# Altium PCB SUBBOARD-MCU.PcbDoc
Units mil, origin at the board's own origin, x right, y up, seen from the top; angles counter-clockwise.
Board outline 4965 x 4640 mil, 2 copper layers (Top Layer, Bottom Layer); 3 components, 0 nets, 288 pads, 0 vias.
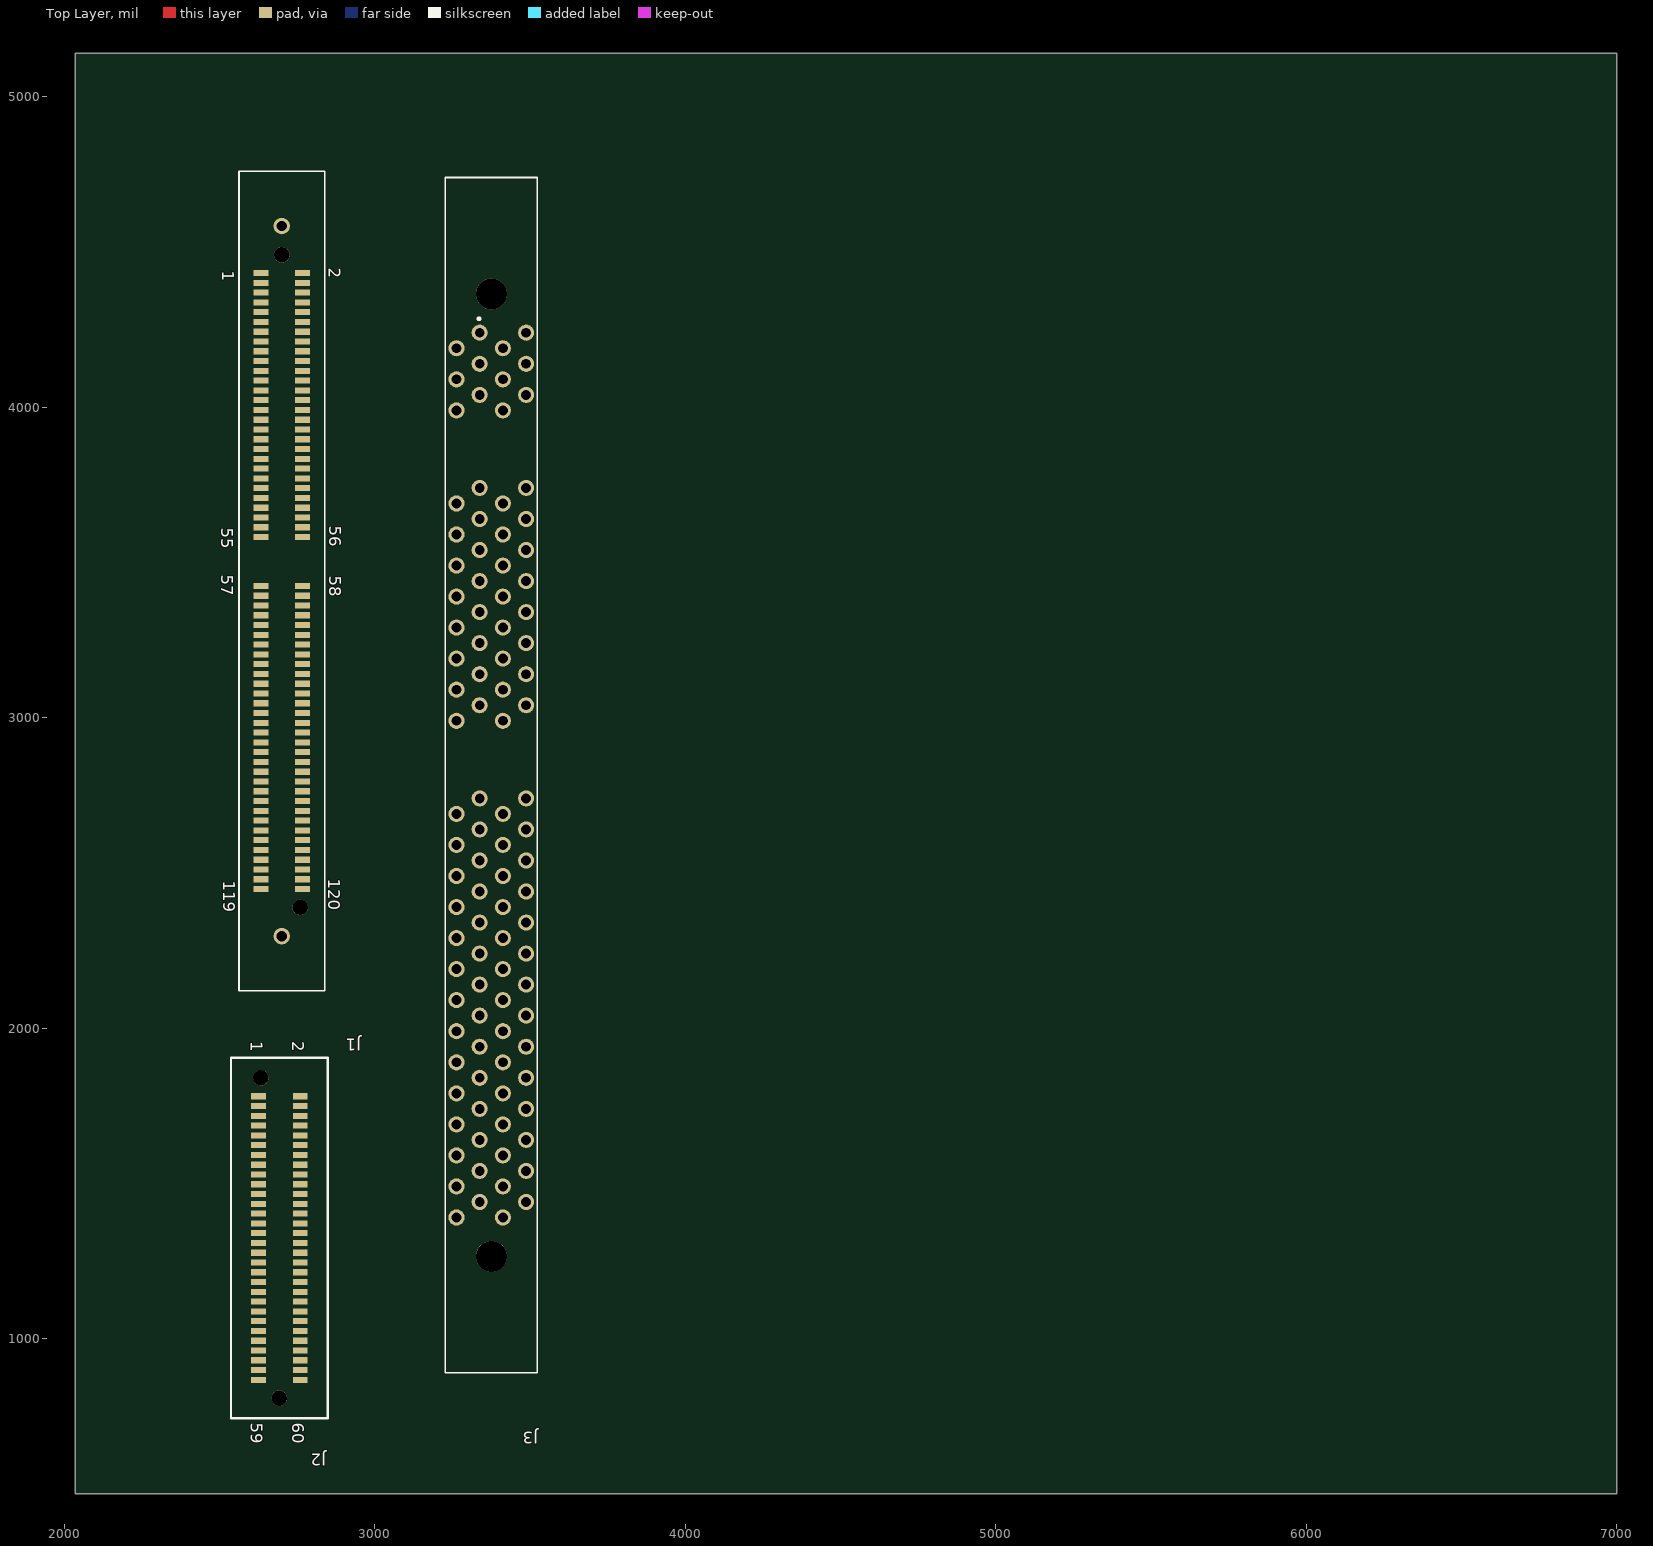
[diagram p0: Top Layer view]
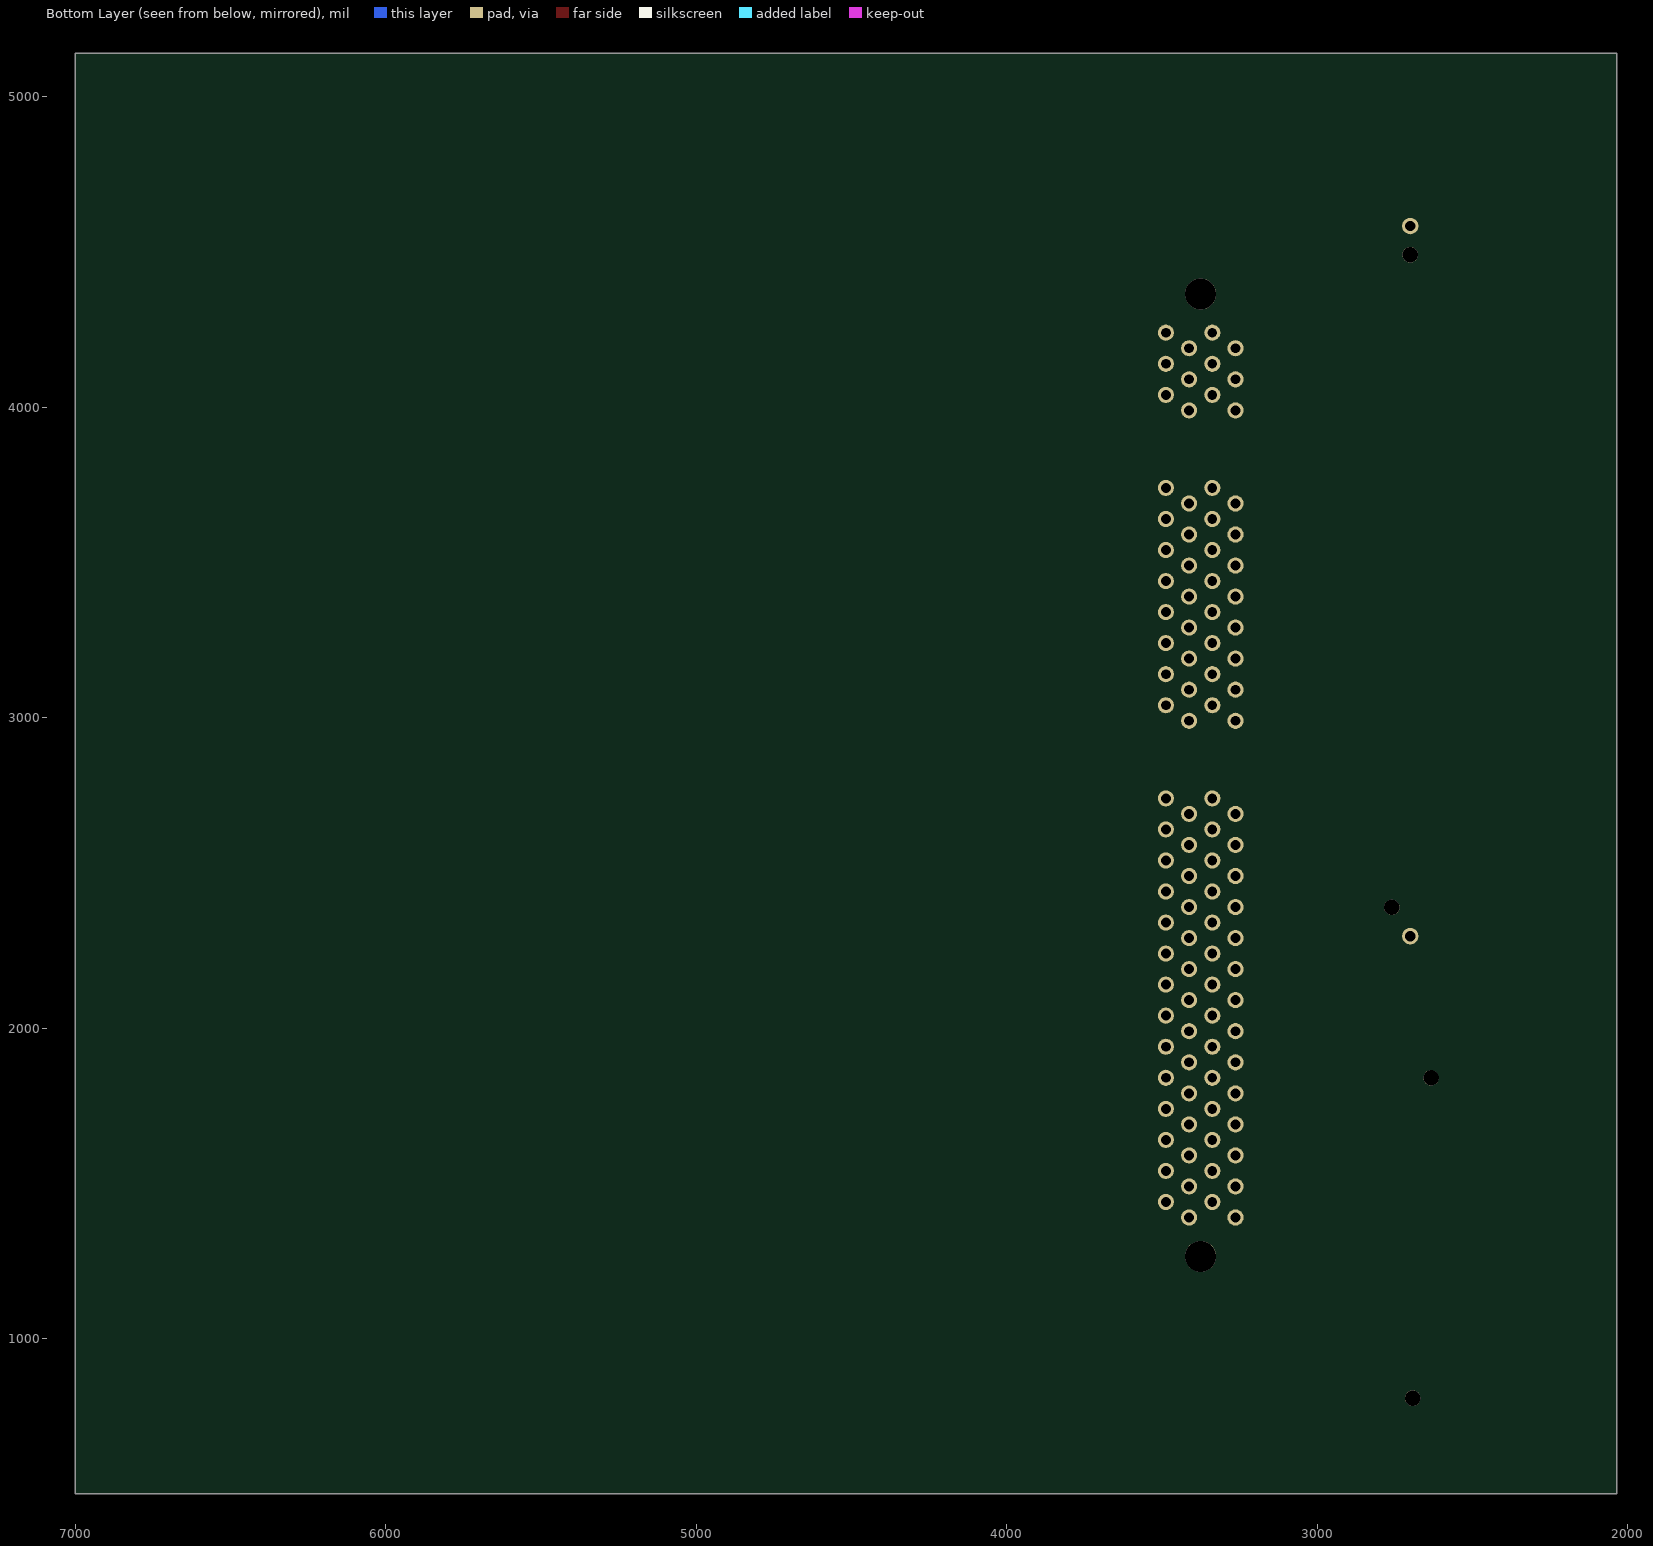
[diagram p1: Bottom Layer view, seen from below]

## Layer stack, top to bottom
Top Solder: solder mask 0.4, Solder Resist, Dk 3.5
Top Layer: signal copper 1.4
Dielectric 1: dielectric 12.6, FR-4, Dk 4.8
Bottom Layer: signal copper 1.4
Bottom Solder: solder mask 0.4, Solder Resist, Dk 3.5

## Board outline
2035,500 7000,500 7000,5140 2035,5140

## Design rules (kind name [scope] priority, off if disabled: settings)
Clearance [All] p1: gap=10 ignorepadtopadclearanceinfootprint=FALSE except(0: Arc-Hole Track-Hole SMDPad-Hole THPad-Hole Via-Hole Fill-Hole Poly-Hole Region-Hole Text-Hole)
PolygonConnect [All] p1: connectstyle=Relief reliefconductorwidth=10 reliefentries=4 polygonreliefangle="90 Angle" airgapwidth=10
RoomDefinition SUBBOARD-MCU [InComponentClass('SUBBOARD-MCU')] p1: confinementstyle=ConfineIn formatcopy=TRUE lockcomponents=FALSE outline 2195,540 4315,540 4315,4995 2195,4995
RoutingVias [All] p1: holewidth=28 width=50 viastyle="Through Hole" minholewidth=28 minwidth=50 maxholewidth=28 maxwidth=50
SolderMaskExpansion [All] p1: expansion=4 istentingtop=FALSE
Width [All] p1: maxlimit=10 minlimit=10 preferedwidth=10
30 further rules are at their usual default settings.

## Components (designator, comment, footprint, x,y, rotation, side; value= is the part's Value field where it differs from the comment)
J1 "HSEC8-160-01-L-DV-A-BL" HSEC8-160-01-L-DV-A-BL 2700,3440 r270 top
J2 "HSEC8-130-01-L-DV-A" HSEC8-130-01-L-DV-A 2692.01,1323.74 r270 top
J3 "5390213-1" TE_5390213-1 3375,2815 r270 top

## Footprints (in the part's own frame and the unit in brackets; to place one, negate y for a bottom-side part, rotate by r counter-clockwise, add the part's x,y. Pads: shape width x height; smd on the part's side, far side on the other; paste and mask are expansions set on the pad)
HSEC8-130-01-L-DV-A [mm]
  rect 0.5x1.2 smd mask+0: 1(-11.601,-1.702) 2(-11.601,1.702) 3(-10.801,-1.702) 4(-10.801,1.702) 5(-10.001,-1.702) 6(-10.001,1.702) 7(-9.201,-1.702) 8(-9.201,1.702) 9(-8.401,-1.702) 10(-8.401,1.702) 11(-7.601,-1.702) 12(-7.601,1.702) 13(-6.801,-1.702) 14(-6.801,1.702) 15(-6.001,-1.702) 16(-6.001,1.702) 17(-5.201,-1.702) 18(-5.201,1.702) 19(-4.401,-1.702) 20(-4.401,1.702) 21(-3.6,-1.702) 22(-3.6,1.702) 23(-2.8,-1.702) 24(-2.8,1.702) 25(-2,-1.702) 26(-2,1.702) 27(-1.2,-1.702) 28(-1.2,1.702) 29(-0.4,-1.702) 30(-0.4,1.702) 31(0.4,-1.702) 32(0.4,1.702) 33(1.2,-1.702) 34(1.2,1.702) 35(2,-1.702) 36(2,1.702) 37(2.8,-1.702) 38(2.8,1.702) 39(3.6,-1.702) 40(3.6,1.702) 41(4.401,-1.702) 42(4.401,1.702) 43(5.201,-1.702) 44(5.201,1.702) 45(6.001,-1.702) 46(6.001,1.702) 47(6.801,-1.702) 48(6.801,1.702) 49(7.601,-1.702) 50(7.601,1.702) 51(8.401,-1.702) 52(8.401,1.702) 53(9.201,-1.702) 54(9.201,1.702) 55(10.001,-1.702) 56(10.001,1.702) 57(10.801,-1.702) 58(10.801,1.702) 59(11.601,-1.702) 60(11.601,1.702)
  round 1.27 hole 1.27 unplated: ""(-13.1,-1.499) ""(13.1,0)
  silkscreen extent -14.75,-3.95 14.75,3.95, body extent -14.3,-3.5 14.3,3.5, height 7.95
HSEC8-160-01-L-DV-A-BL [mm]
  rect 0.5x1.2 smd: 1(-25.2,-1.7) 2(-25.2,1.7) 3(-24.4,-1.7) 4(-24.4,1.7) 5(-23.6,-1.7) 6(-23.6,1.7) 7(-22.8,-1.7) 8(-22.8,1.7) 9(-22,-1.7) 10(-22,1.7) 11(-21.2,-1.7) 12(-21.2,1.7) 13(-20.4,-1.7) 14(-20.4,1.7) 15(-19.6,-1.7) 16(-19.6,1.7) 17(-18.8,-1.7) 18(-18.8,1.7) 19(-18,-1.7) 20(-18,1.7) 21(-17.2,-1.7) 22(-17.2,1.7) 23(-16.4,-1.7) 24(-16.4,1.7) 25(-15.6,-1.7) 26(-15.6,1.7) 27(-14.8,-1.7) 28(-14.8,1.7) 29(-14,-1.7) 30(-14,1.7) 31(-13.2,-1.7) 32(-13.2,1.7) 33(-12.4,-1.7) 34(-12.4,1.7) 35(-11.6,-1.7) 36(-11.6,1.7) 37(-10.8,-1.7) 38(-10.8,1.7) 39(-10,-1.7) 40(-10,1.7) 41(-9.2,-1.7) 42(-9.2,1.7) 43(-8.4,-1.7) 44(-8.4,1.7) 45(-7.6,-1.7) 46(-7.6,1.7) 47(-6.8,-1.7) 48(-6.8,1.7) 49(-6,-1.7) 50(-6,1.7) 51(-5.2,-1.7) 52(-5.2,1.7) 53(-4.4,-1.7) 54(-4.4,1.7) 55(-3.6,-1.7) 56(-3.6,1.7) 57(0.4,-1.7) 58(0.4,1.7) 59(1.2,-1.7) 60(1.2,1.7) 61(2,-1.7) 62(2,1.7) 63(2.8,-1.7) 64(2.8,1.7) 65(3.6,-1.7) 66(3.6,1.7) 67(4.4,-1.7) 68(4.4,1.7) 69(5.2,-1.7) 70(5.2,1.7) 71(6,-1.7) 72(6,1.7) 73(6.8,-1.7) 74(6.8,1.7) 75(7.6,-1.7) 76(7.6,1.7) 77(8.4,-1.7) 78(8.4,1.7) 79(9.2,-1.7) 80(9.2,1.7) 81(10,-1.7) 82(10,1.7) 83(10.8,-1.7) 84(10.8,1.7) 85(11.6,-1.7) 86(11.6,1.7) 87(12.4,-1.7) 88(12.4,1.7) 89(13.2,-1.7) 90(13.2,1.7) 91(14,-1.7) 92(14,1.7) 93(14.8,-1.7) 94(14.8,1.7) 95(15.6,-1.7) 96(15.6,1.7) 97(16.4,-1.7) 98(16.4,1.7) 99(17.2,-1.7) 100(17.2,1.7) 101(18,-1.7) 102(18,1.7) 103(18.8,-1.7) 104(18.8,1.7) 105(19.6,-1.7) 106(19.6,1.7) 107(20.4,-1.7) 108(20.4,1.7) 109(21.2,-1.7) 110(21.2,1.7) 111(22,-1.7) 112(22,1.7) 113(22.8,-1.7) 114(22.8,1.7) 115(23.6,-1.7) 116(23.6,1.7) 117(24.4,-1.7) 118(24.4,1.7) 119(25.2,-1.7) 120(25.2,1.7)
  round 1.348 hole 0.84: P1(-29.05,0) P2(29.05,0)
  round 1.27 hole 1.27 unplated: ""(-26.7,0) ""(26.7,1.5)
  silkscreen extent -33.53,-3.5 33.53,3.5, body extent -33.49,-3.5 33.56,3.5, height 12.3
TE_5390213-1 [mm]
  round 1.318 hole 0.81: 1(-36.195,-0.95) 2(-34.925,-2.85) 3(-33.655,-0.95) 4(-32.385,-2.85) 5(-31.115,-0.95) 6(-29.845,-2.85) 7(-23.495,-0.95) 8(-22.225,-2.85) 9(-20.955,-0.95) 10(-19.685,-2.85) 11(-18.415,-0.95) 12(-17.145,-2.85) 13(-15.875,-0.95) 14(-14.605,-2.85) 15(-13.335,-0.95) 16(-12.065,-2.85) 17(-10.795,-0.95) 18(-9.525,-2.85) 19(-8.255,-0.95) 20(-6.985,-2.85) 21(-5.715,-0.95) 22(-4.445,-2.85) 23(1.905,-0.95) 24(3.175,-2.85) 25(4.445,-0.95) 26(5.715,-2.85) 27(6.985,-0.95) 28(8.255,-2.85) 29(9.525,-0.95) 30(10.795,-2.85) 31(12.065,-0.95) 32(13.335,-2.85) 33(14.605,-0.95) 34(15.875,-2.85) 35(17.145,-0.95) 36(18.415,-2.85) 37(19.685,-0.95) 38(20.955,-2.85) 39(22.225,-0.95) 40(23.495,-2.85) 41(24.765,-0.95) 42(26.035,-2.85) 43(27.305,-0.95) 44(28.575,-2.85) 45(29.845,-0.95) 46(31.115,-2.85) 47(32.385,-0.95) 48(33.655,-2.85) 49(34.925,-0.95) 50(36.195,-2.85) 51(-36.195,2.85) 52(-34.925,0.95) 53(-33.655,2.85) 54(-32.385,0.95) 55(-31.115,2.85) 56(-29.845,0.95) 57(-23.495,2.85) 58(-22.225,0.95) 59(-20.955,2.85) 60(-19.685,0.95) 61(-18.415,2.85) 62(-17.145,0.95) 63(-15.875,2.85) 64(-14.605,0.95) 65(-13.335,2.85) 66(-12.065,0.95) 67(-10.795,2.85) 68(-9.525,0.95) 69(-8.255,2.85) 70(-6.985,0.95) 71(-5.715,2.85) 72(-4.445,0.95) 73(1.905,2.85) 74(3.175,0.95) 75(4.445,2.85) 76(5.715,0.95) 77(6.985,2.85) 78(8.255,0.95) 79(9.525,2.85) 80(10.795,0.95) 81(12.065,2.85) 82(13.335,0.95) 83(14.605,2.85) 84(15.875,0.95) 85(17.145,2.85) 86(18.415,0.95) 87(19.685,2.85) 88(20.955,0.95) 89(22.225,2.85) 90(23.495,0.95) 91(24.765,2.85) 92(26.035,0.95) 93(27.305,2.85) 94(28.575,0.95) 95(29.845,2.85) 96(31.115,0.95) 97(32.385,2.85) 98(33.655,0.95) 99(34.925,2.85) 100(36.195,0.95)
  round 2.54 hole 2.54 unplated: ""(-39.37,0) ""(39.37,0)
  silkscreen extent -48.89,-3.77 48.89,3.77, body extent -53,-3.75 53,3.79, height 23.75

## Part data
J1: "Standard Card Edge Connectors 0.80 mm Edge Rate High-Speed Edge Card Connector, Vertical", Manufacturer=Samtec, Supplier Part Number 1=SAM9083-ND, Category="Card Edge Connectors", ComponentLink1Description=http://www.farnell.com/datasheets/2260788.pdf?src-supplier=Farnell, ComponentLink1URL=http://www.farnell.com/datasheets/2260788.pdf?src-supplier=Farnell, ComponentLink2Description=http://www.farnell.com/datasheets/2581211.pdf?src-supplier=Farnell, ComponentLink2URL=http://www.farnell.com/datasheets/2581211.pdf?src-supplier=Farnell, ComponentLink3Description=http://suddendocs.samtec.com/catalog_english/hsec8_dv.pdf?src-supplier=Digi-Key, ComponentLink3URL=http://suddendocs.samtec.com/catalog_english/hsec8_dv.pdf?src-supplier=Digi-Key, ComponentLink4Description=http://www.samtec.com/ftppub/pdf/HSEC8_DV.pdf?src-supplier=Avnet, ComponentLink4URL=http://www.samtec.com/ftppub/pdf/HSEC8_DV.pdf?src-supplier=Avnet, ComponentLink5Description=http://www.farnell.com/datasheets/2581211.pdf?src-supplier=Element14, ComponentLink5URL=http://www.farnell.com/datasheets/2581211.pdf?src-supplier=Element14, ComponentLink6Description=http://www.farnell.com/datasheets/2581211.pdf?src-supplier=Newark, ComponentLink6URL=http://www.farnell.com/datasheets/2581211.pdf?src-supplier=Newark, Contact Plating=Gold, Manufacturer Part Number=HSEC8-160-01-L-DV-A-BL, Mount="Surface Mount", Number of Contacts=120, Number of Rows=2, Packaging=Bulk, Pitch=0.8mm, Pricing 1="1=8,23000, 10=7,88900, 25=7,20320, 50=6,86000, 100=6,51700, 250=5,83100, 500=5,48800, 1000=4,80200, 2500=4,56190 (USD)", Radiation Hardening=No, RoHS=Yes, Stock 1=1044, Supplier 1=Digi-Key, Supplier 2=Arrow, Supplier 3=Mouser, Supplier Part Number 2=HSEC8-160-01-L-DV-A-BL, Supplier Part Number 3=200-HSEC816001LDVABL, Termination=Solder
J2: "Standard Card Edge Connectors 0.80 mm Edge Rate High-Speed Edge Card Connector, Vertical", Current Rating=3.1A, Housing Color=Black, Manufacturer=Samtec, Max Operating Temperature=125°C, Min Operating Temperature=-55°C, Supplier Part Number 1=SAM9080-ND, Category="Card Edge Connectors", ComponentLink1Description=https://datasheet.ciiva.com/25615/0900766b8114ca7f-25615848.pdf?src-supplier=RSComponents, ComponentLink1URL=https://datasheet.ciiva.com/25615/0900766b8114ca7f-25615848.pdf?src-supplier=RSComponents, ComponentLink2Description=https://datasheet.ciiva.com/16666/hsec8-dv-16666379.pdf?src-supplier=Avnet+Europe, ComponentLink2URL=https://datasheet.ciiva.com/16666/hsec8-dv-16666379.pdf?src-supplier=Avnet+Europe, Contact Material=Copper, Contact Plating=Gold, Depth=7.8mm, Gender=Female, Housing Material=Polymer, Length=28.6mm, Manufacturer Part Number=HSEC8-130-01-L-DV-A, Mount="Surface Mount", Number of Contacts=60, Number of Rows=2, Orientation=Straight, Packaging=Bulk, Pitch=0.8mm, Pricing 1="1=4,35000, 10=4,17600, 25=3,82800, 50=3,65400, 100=3,48000, 250=3,04500, 500=2,95800, 1000=2,52300, 2500=2,34900 (USD)", Radiation Hardening=No, RoHS=Yes, Stock 1=491, Supplier 1=Digi-Key, Supplier 2=Mouser, Supplier 3=Farnell, Supplier 4=Newark, Supplier Part Number 2=200-HSEC813001LDVA, Supplier Part Number 3=3103224, Supplier Part Number 4=43W4470, Termination=Solder, Width=5.6mm
J3: "100 Position DIMM DRAM Socket Through Hole", Package=None, Supplier Part Number 1=42K7163, Availability=Unavailable, Centerline_Pitch="1.27 mm[.05 in]", EU_RoHS_Compliance=Compliant, MF="TE Connectivity", MP=5390213-1, Number_of_Positions=100, Price=None, Product_Type=Socket, SnapEDA_Link=https://www.snapeda.com/parts/5390213-1/TE%20Connectivity%20AMP%20Connectors/view-part/781316/?ref=snap, Supplier 1=Newark, Supplier 2=Digi-Key, Supplier 3=Mouser, Supplier Part Number 2=A121375-ND, Supplier Part Number 3=571-5390213-1, TE_purchase_URL=https://www.te.com/usa-en/product-5390213-1.html?te_bu=Cor&te_type=disp&te_campaign=seda_glo_cor-seda-global-disp-prtnr-fy19-seda-model-bom-cta_sma-317_1&elqCampaignId=32493

## Nets (pads, with @x,y where several pads share a name; then routed paths per layer and width w, separated by ;. In a path a pad name is that pad's centre, name@x,y a point inside that pad or via, vN(x,y) a via of type N, cw(c..) or ccw(c..) an arc to the next point about the centre after c; other vN are vias at no path point)
pads on no net: J1. J1.1 J1.2 J1.3 J1.4 J1.5 J1.6 J1.7 J1.8 J1.9 J1.10 J1.11 J1.12 J1.13 J1.14 J1.15 J1.16 J1.17 J1.18 J1.19 J1.20 J1.21 J1.22 J1.23 J1.24 J1.25 J1.26 J1.27 J1.28 J1.29 J1.30 J1.31 J1.32 J1.33 J1.34 J1.35 J1.36 J1.37 J1.38 J1.39 J1.40 J1.41 J1.42 J1.43 J1.44 J1.45 J1.46 J1.47 J1.48 J1.49 J1.50 J1.51 J1.52 J1.53 J1.54 J1.55 J1.56 J1.57 J1.58 J1.59 J1.60 J1.61 J1.62 J1.63 J1.64 J1.65 J1.66 J1.67 J1.68 J1.69 J1.70 J1.71 J1.72 J1.73 J1.74 J1.75 J1.76 J1.77 J1.78 J1.79 J1.80 J1.81 J1.82 J1.83 J1.84 J1.85 J1.86 J1.87 J1.88 J1.89 J1.90 J1.91 J1.92 J1.93 J1.94 J1.95 J1.96 J1.97 J1.98 J1.99 J1.100 J1.101 J1.102 J1.103 J1.104 J1.105 J1.106 J1.107 J1.108 J1.109 J1.110 J1.111 J1.112 J1.113 J1.114 J1.115 J1.116 J1.117 J1.118 J1.119 J1.120 J1.P1 J1.P2 J2. J2.1 J2.2 J2.3 J2.4 J2.5 J2.6 J2.7 J2.8 J2.9 J2.10 J2.11 J2.12 J2.13 J2.14 J2.15 J2.16 J2.17 J2.18 J2.19 J2.20 J2.21 J2.22 J2.23 J2.24 J2.25 J2.26 J2.27 J2.28 J2.29 J2.30 J2.31 J2.32 J2.33 J2.34 J2.35 J2.36 J2.37 J2.38 J2.39 J2.40 J2.41 J2.42 J2.43 J2.44 J2.45 J2.46 J2.47 J2.48 J2.49 J2.50 J2.51 J2.52 J2.53 J2.54 J2.55 J2.56 J2.57 J2.58 J2.59 J2.60 J3. J3.1 J3.2 J3.3 J3.4 J3.5 J3.6 J3.7 J3.8 J3.9 J3.10 J3.11 J3.12 J3.13 J3.14 J3.15 J3.16 J3.17 J3.18 J3.19 J3.20 J3.21 J3.22 J3.23 J3.24 J3.25 J3.26 J3.27 J3.28 J3.29 J3.30 J3.31 J3.32 J3.33 J3.34 J3.35 J3.36 J3.37 J3.38 J3.39 J3.40 J3.41 J3.42 J3.43 J3.44 J3.45 J3.46 J3.47 J3.48 J3.49 J3.50 J3.51 J3.52 J3.53 J3.54 J3.55 J3.56 J3.57 J3.58 J3.59 J3.60 J3.61 J3.62 J3.63 J3.64 J3.65 J3.66 J3.67 J3.68 J3.69 J3.70 J3.71 J3.72 J3.73 J3.74 J3.75 J3.76 J3.77 J3.78 J3.79 J3.80 J3.81 J3.82 J3.83 J3.84 J3.85 J3.86 J3.87 J3.88 J3.89 J3.90 J3.91 J3.92 J3.93 J3.94 J3.95 J3.96 J3.97 J3.98 J3.99 J3.100

## Text inside footprints (layer, text, board x,y; h text height)
J1: Top Overlay "1" at 2508.27,4439.21 h39.37 r270; Top Overlay "2" at 2850.79,4449.06 h39.37 r270; Top Overlay "55" at 2505.12,3612.44 h39.37 r270; Top Overlay "56" at 2852.76,3617.56 h39.37 r270; Top Overlay "57" at 2505.51,3459.68 h39.37 r270; Top Overlay "58" at 2852.76,3456.54 h39.37 r270; Top Overlay "120" at 2849.61,2481.73 h39.37 r270; Top Overlay "119" at 2511.02,2475.04 h39.37 r270
J2: Top Overlay "1" at 2600,1958.43 h39.37 r270; Top Overlay "2" at 2734.02,1958.43 h39.37 r270; Top Overlay "59" at 2600,729.57 h39.37 r270; Top Overlay "60" at 2734.02,729.57 h39.37 r270